# Altium PCB vizmertekpcb.PcbDoc
Units mm, origin at the board's own origin, x right, y up, seen from the top; angles counter-clockwise.
Board outline 90.17 x 81.89 mm, 2 copper layers (Top Layer, Bottom Layer); 17 components, 43 nets, 199 pads, 31 vias.
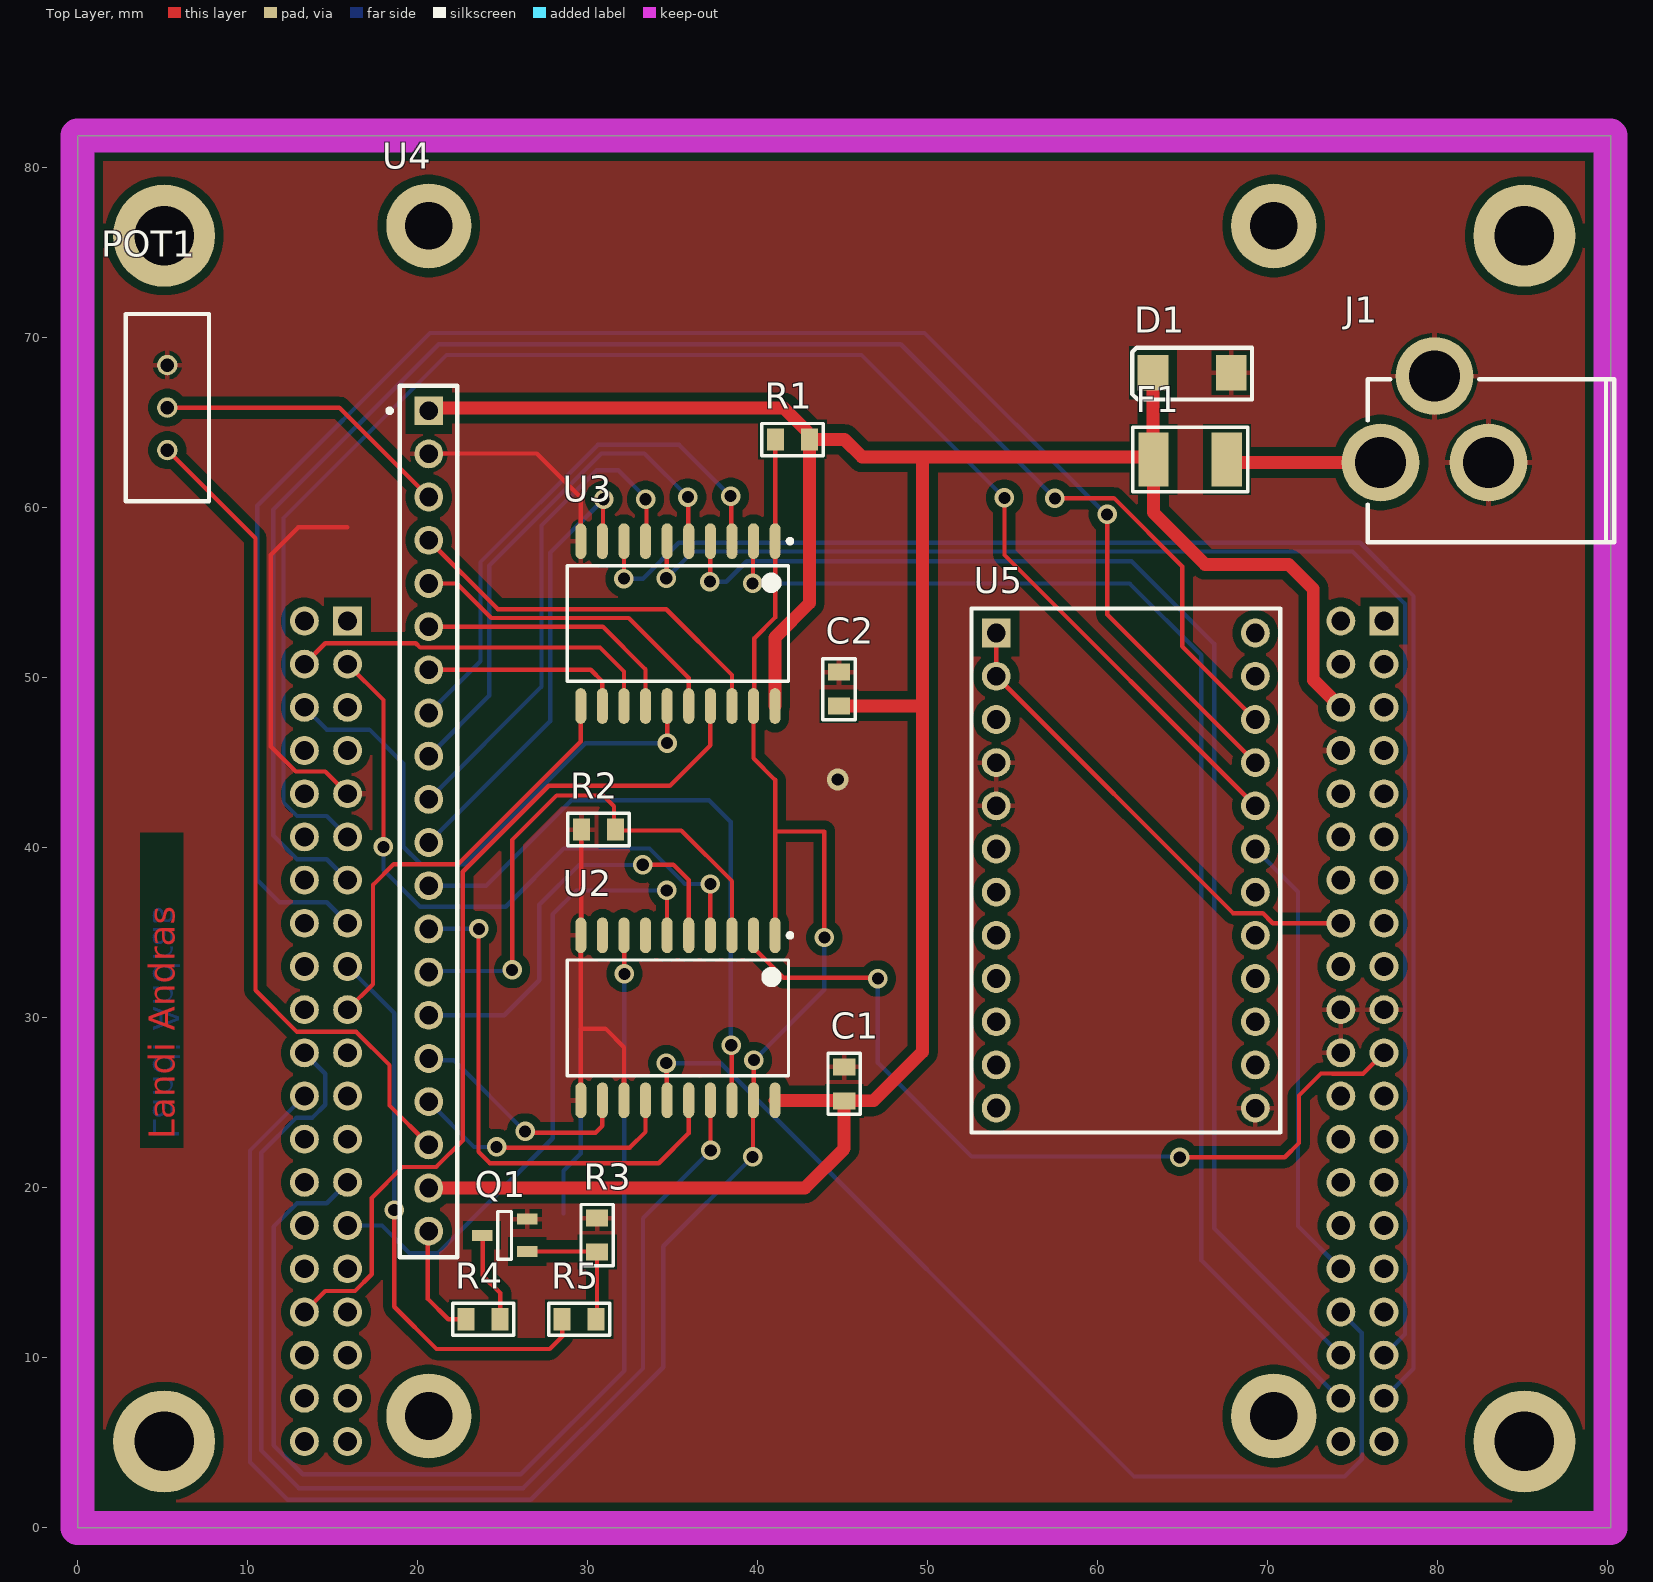
[diagram p0: Top Layer view]
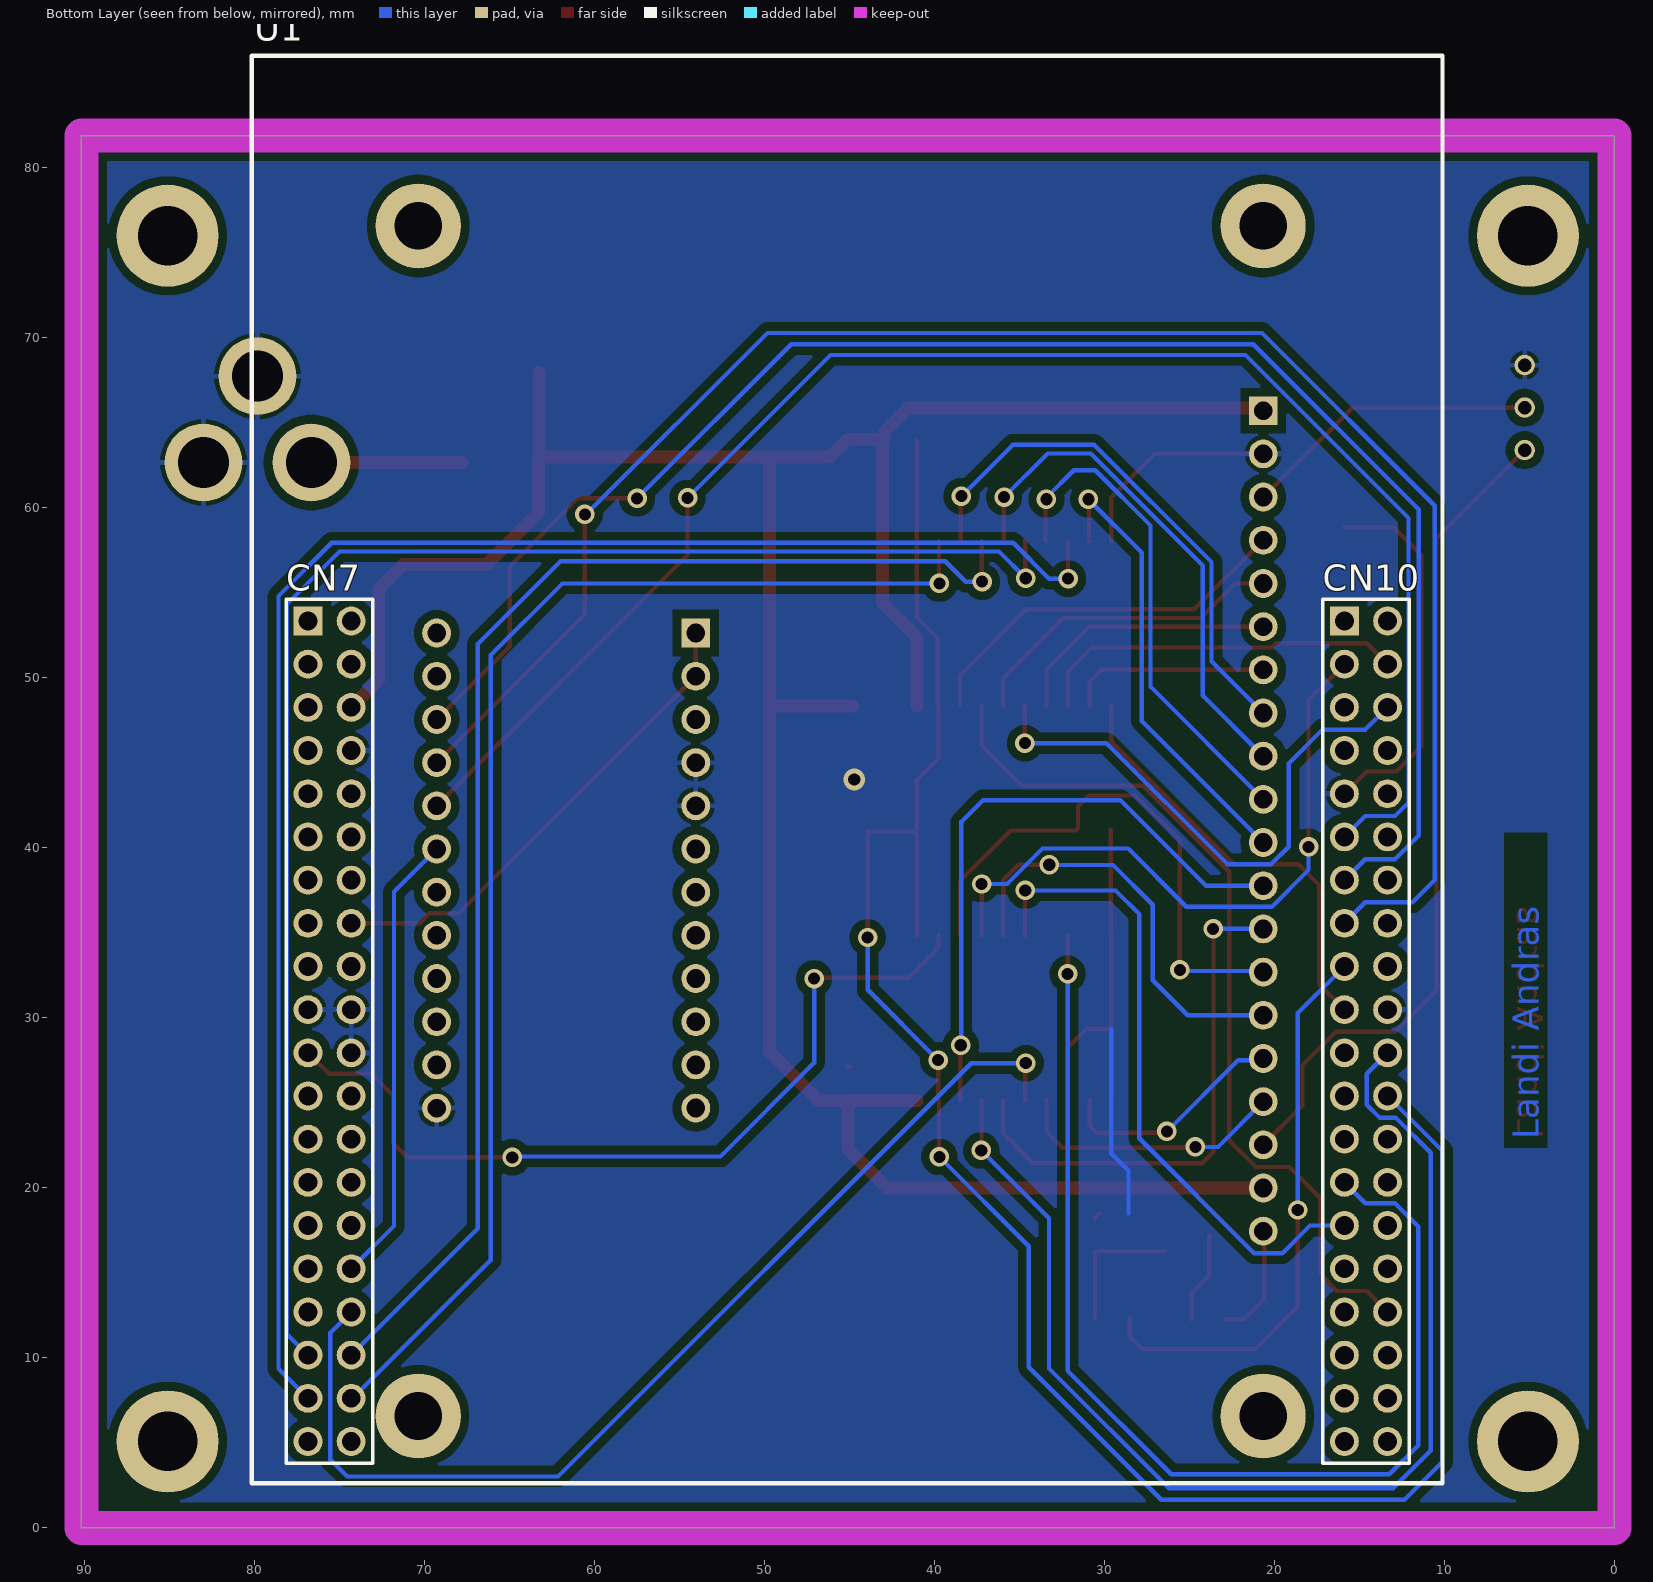
[diagram p1: Bottom Layer view, seen from below]
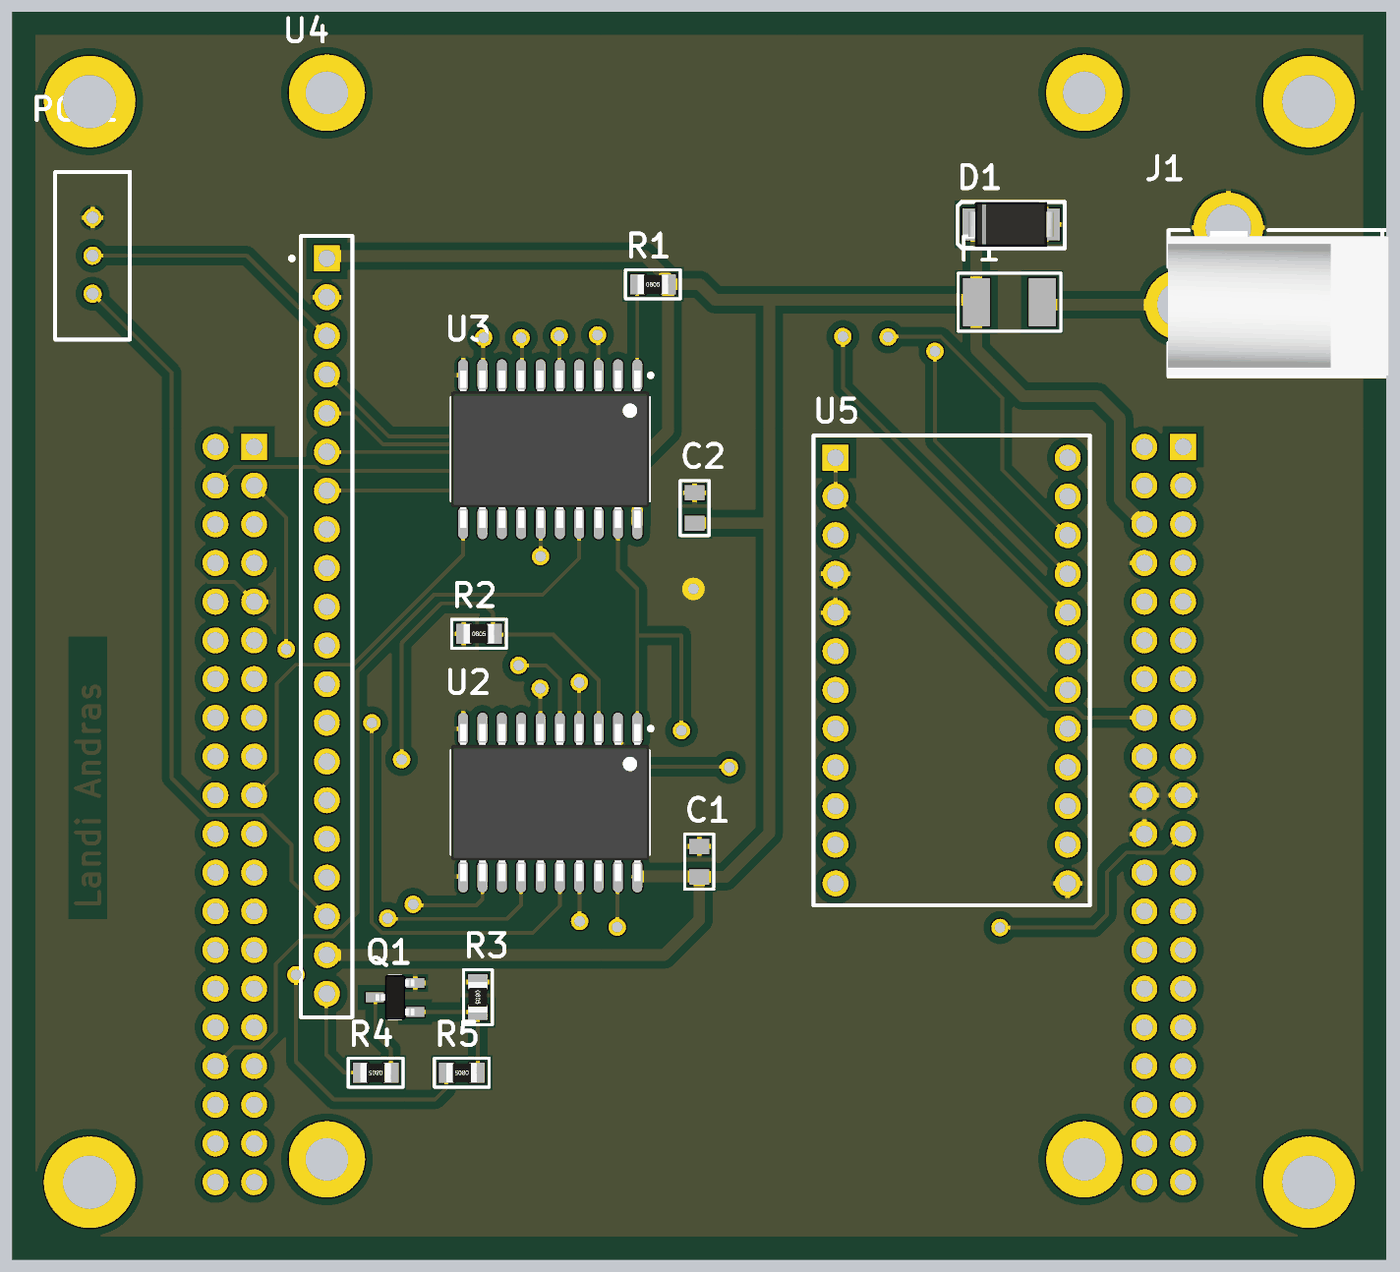
[diagram p2: 3D render of the assembled board from above, using the file's embedded part models]

## Layer stack, top to bottom
Top Solder: solder mask 0.0102, Solder Resist, Dk 3.5
Top Layer: signal copper 0.0356
Dielectric 1: dielectric 0.32, FR-4, Dk 4.8
Bottom Layer: signal copper 0.0356
Bottom Solder: solder mask 0.0102, Solder Resist, Dk 3.5

## Board outline
0,81.89 3.378,81.89 90.17,81.89 90.17,0 0,0

## Design rules (kind name [scope] priority, off if disabled: settings)
BoardOutlineClearance [All] p1: gap=0.5 ignorepadtopadclearanceinfootprint=FALSE
Clearance [All] p1: gap=0.254 ignorepadtopadclearanceinfootprint=FALSE except(0.508: Arc-Poly Track-Poly SMDPad-Poly THPad-Poly Via-Poly Fill-Poly Poly-Poly)
ComponentClearance [All] p1: gap=0.254 collisioncheckmode=3 verticalgap=0.2 showdistances=FALSE donotcheckwithout3dbody=TRUE
DiffPairsRouting [All] p1: maxlimit=0.25 minlimit=0.25 mostfreqgap=0.25 toplayer_minwidth=0.3 toplayer_maxwidth=0.38 toplayer_prefwidth=0.38 bottomlayer_minwidth=0.3 bottomlayer_maxwidth=0.38 bottomlayer_prefwidth=0.38 maxuncoupledlength=12.7
HoleSize [All] p1: absolutevalues=TRUE maxlimit=3.5 minlimit=0.4 maxpercent=80.000 minpercent=20.000
HoleToHoleClearance [All] p1: gap=0.25 allowstackedmicrovias=TRUE
MinimumAnnularRing [All] p1: minimumring=0.2
MinimumSolderMaskSliver [All] p1: minsoldermaskwidth=0.05
PlaneClearance [All] p1: clearance=0.5
PlaneConnect [All] p1: pad.planeconnectstyle=Relief pad.reliefexpansion=0.5 pad.reliefentries=4 pad.reliefconductorwidth=0.3 pad.reliefairgap=0.25 via.planeconnectstyle=Direct via.reliefexpansion=0.508 via.reliefentries=4 via.reliefconductorwidth=0.254 via.reliefairgap=0.254
PolygonConnect [All] p1: thpad.connectstyle=Relief thpad.reliefconductorwidth=0.3 thpad.reliefentries=4 thpad.polygonreliefangle="90 Angle" thpad.airgapwidth=0.25 smdpad.connectstyle=Relief smdpad.reliefconductorwidth=0.3 smdpad.reliefentries=4 smdpad.polygonreliefangle="90 Angle" smdpad.airgapwidth=0.25 via.connectstyle=Direct via.reliefconductorwidth=0.254 via.reliefentries=4 via.polygonreliefangle="90 Angle" via.airgapwidth=0.254
RoutingVias [All] p1: holewidth=0.4 width=0.8 viastyle="Through Hole" minholewidth=0.711 minwidth=1.143 maxholewidth=0.711 maxwidth=1.2
SilkToSilkClearance [All] p1: silktosilkclearance=0.1
SilkToSolderMaskClearance [IsPad] p1: minsilkscreentomaskgap=0.1 clearancetoexposedcopper=TRUE
SolderMaskExpansion [All] p1: expansion=0.1 istentingtop=FALSE
Width [All] p1: maxlimit=2.54 minlimit=0.254 preferedwidth=0.254
21 further rules are at their usual default settings.

## Classes and differential pairs
net class DB[0..7]: DB0 DB1 DB2 DB3 DB4 DB5 DB6 DB7
component class kijelzo: C1 C2 POT1 Q1 R1 R2 R3 R4 R5 U2 U3 U4
component class gyorsulasmero: U5
component class Nucleo: D1 F1 J1 U1

## Components (designator, comment, footprint, x,y, rotation, side; value= is the part's Value field where it differs from the comment)
C1 "100nF" FP_0805_CAP_085 45.085,26.121 r270 top
C2 "100nF" FP_0805_CAP_085 44.78,49.327 r270 top
D1 "6.7V" FP_SMA 65.546,67.945 r180 top
F1 "Fuse" FP_MULTIFUSE 67.589,62.84 r180 top
J1 "2.xmm" FP_DC_TAP_ANYA 76.632,62.662 r270 top
POT1 "10K" potentiometer 5.272,65.891 r0 top
Q1 "NMOS" FP_SOT23-3 25.114,17.206 r0 top
R1 "100k" FP_0805_RES 42.046,64.008 r0 top
R2 "1K" FP_0805_RES 30.632,41.072 r0 top
R3 "10k" FP_0805_RES 30.556,17.221 r270 top
R4 "100" FP_0805_RES 23.851,12.268 r180 top
R5 "100" FP_0805_RES 29.499,12.268 r180 top
U1 "NUCLEO-F446RE" FP_NUCLEO-64_2x20 76.835,53.34 r180 bottom
U2 "74HCT244" SO-20 35.306,29.997 r270 top
U3 "74HCT244" SO-20 35.306,53.188 r270 top (schematic designator x)
U4 "RG12864B-TIW-V" FP_LCD 20.65,65.709 r270 top (schematic designator U3)
U5 "MKI160V1" FP_DIL24 54.026,52.629 r180 top

## Footprints (in the part's own frame and the unit in brackets; to place one, negate y for a bottom-side part, rotate by r counter-clockwise, add the part's x,y. Pads: shape width x height; smd on the part's side, far side on the other; paste and mask are expansions set on the pad)
FP_0805_CAP_085 [mm] "0805 kapacitás YAGEO 0.85mm magas"
  rect 1x1.3 smd: 1(-1,0) 2(1,0)
  silkscreen extent -1.8,-0.95 1.8,0.95, body extent -1,-0.64 1.03,0.64, height 0.85
FP_0805_RES [mm] "0805 ellenállás"
  rect 1x1.3 smd: 1(-1,0) 2(1,0)
  silkscreen extent -1.8,-0.95 1.8,0.95, body extent -1,-0.62 1,0.63, height 0.62
FP_DC_TAP_ANYA [mil] "DC HEBA25 TÁPFESZÜLTSÉG ALJZAT ZÁRT, NYÁKBA 90°"
  round 180 hole 118: 1(0,0) 2(0,250) 3(-200,125)
  silkscreen extent -193,-30 185,541, body extent -190,-31 183,539, height 440
FP_DIL24 [mm] "DIL24"
  rect 1.7x1.7 hole 1.1: 1(0,0)
  round 1.7 hole 1.1: 2(0,2.54) 3(0,5.08) 4(0,7.62) 5(0,10.16) 6(0,12.7) 7(0,15.24) 8(0,17.78) 9(0,20.32) 10(0,22.86) 11(0,25.4) 12(0,27.94) 13(-15.24,27.94) 14(-15.24,25.4) 15(-15.24,22.86) 16(-15.24,20.32) 17(-15.24,17.78) 18(-15.24,15.24) 19(-15.24,12.7) 20(-15.24,10.16) 21(-15.24,7.62) 22(-15.24,5.08) 23(-15.24,2.54) 24(-15.24,0)
  silkscreen extent -16.7,-1.45 1.45,29.38, body extent -16.52,-1.28 1.28,29.21, height 4.86
FP_LCD [mm]
  rect 1.7x1.7 hole 1.1: 1(0,0)
  round 1.7 hole 1.1: 2(2.54,0) 3(5.08,0) 4(7.62,0) 5(10.16,0) 6(12.7,0) 7(15.24,0) 8(17.78,0) 9(20.32,0) 10(22.86,0) 11(25.4,0) 12(27.94,0) 13(30.48,0) 14(33.02,0) 15(35.56,0) 16(38.1,0) 17(40.64,0) 18(43.18,0) 19(45.72,0) 20(48.26,0)
  round 5 hole 2.8: ""(-10.87,49.7) ""(-10.87,0) ""(59.13,49.7) ""(59.13,0)
  silkscreen extent -1.47,-2.4 49.8,1.67, body extent -13.37,-3 61.63,52.2, height 17.6
FP_MULTIFUSE [mm] "POLYFUSE SMD 1812"
  rect 1.78x3.15 smd: 1(0,0) 2(4.318,0)
  silkscreen extent -1.22,-1.9 5.53,1.9, body extent -0.12,-1.71 4.57,1.71, height 1
FP_NUCLEO-64_2x20 [mm]
  round 1.7 hole 1.1: 0(0,-48.26) 0(2.54,-48.26) 0(60.96,-48.26) 0(63.5,-48.26) 2(2.54,0) 3(0,-2.54) 4(2.54,-2.54) 5(0,-5.08) 6(2.54,-5.08) 7(0,-7.62) 8(2.54,-7.62) 9(0,-10.16) 10(2.54,-10.16) 11(0,-12.7) 12(2.54,-12.7) 13(0,-15.24) 14(2.54,-15.24) 15(0,-17.78) 16(2.54,-17.78) 17(0,-20.32) 18(2.54,-20.32) 19(0,-22.86) 20(2.54,-22.86) 21(0,-25.4) 22(2.54,-25.4) 23(0,-27.94) 24(2.54,-27.94) 25(0,-30.48) 26(2.54,-30.48) 27(0,-33.02) 28(2.54,-33.02) 29(0,-35.56) 30(2.54,-35.56) 31(0,-38.1) 32(2.54,-38.1) 33(0,-40.64) 34(2.54,-40.64) 35(0,-43.18) 36(2.54,-43.18) 37(0,-45.72) 38(2.54,-45.72) 40(63.5,0) 41(60.96,-2.54) 42(63.5,-2.54) 43(60.96,-5.08) 44(63.5,-5.08) 45(60.96,-7.62) 46(63.5,-7.62) 47(60.96,-10.16) 48(63.5,-10.16) 49(60.96,-12.7) 50(63.5,-12.7) 51(60.96,-15.24) 52(63.5,-15.24) 53(60.96,-17.78) 54(63.5,-17.78) 55(60.96,-20.32) 56(63.5,-20.32) 57(60.96,-22.86) 58(63.5,-22.86) 59(60.96,-25.4) 60(63.5,-25.4) 61(60.96,-27.94) 62(63.5,-27.94) 63(60.96,-30.48) 64(63.5,-30.48) 65(60.96,-33.02) 66(63.5,-33.02) 67(60.96,-35.56) 68(63.5,-35.56) 69(60.96,-38.1) 70(63.5,-38.1) 71(60.96,-40.64) 72(63.5,-40.64) 73(60.96,-43.18) 74(63.5,-43.18) 75(60.96,-45.72) 76(63.5,-45.72)
  rect 1.7x1.7 hole 1.1: 1(0,0) 39(60.96,0)
  silkscreen extent -3.3,-50.72 66.72,33.25, body extent -3.3,-50.72 66.72,33.25, height 11
FP_SMA [mm] "SMA footprint"
  rect 1.8x2.1 smd: 1(-2.3,0) 2(2.3,0)
  silkscreen extent -3.52,-1.48 3.52,1.58, body extent -2.8,-1.47 2.8,1.48, height 2.7
FP_SOT23-3 [mm] "SOT23-3 tok"
  rect 1.2x0.65 smd: 1(1.327,-0.95) 2(1.327,0.95) 3(-1.327,0)
  silkscreen extent -0.4,-1.4 0.4,1.4, body extent -1.27,-1.46 1.27,1.46, height 0.97
potentiometer [mm]
  round 1.2 hole 0.8: 1(0,2.5) 2(0,0) 3(0,-2.5)
  silkscreen extent -2.45,-5.5 2.45,5.5, body extent -2.33,-5.4 2.33,5.4, height 10
SO-20 [mm] "SOIC, 20-Leads, Body 12.80x7.50mm, Pitch 1.27mm, IPC Low Density"
  oval 2.1x0.65 smd: 1(-4.85,5.715) 2(-4.85,4.445) 3(-4.85,3.175) 4(-4.85,1.905) 5(-4.85,0.635) 6(-4.85,-0.635) 7(-4.85,-1.905) 8(-4.85,-3.175) 9(-4.85,-4.445) 10(-4.85,-5.715) 11(4.85,-5.715) 12(4.85,-4.445) 13(4.85,-3.175) 14(4.85,-1.905) 15(4.85,-0.635) 16(4.85,0.635) 17(4.85,1.905) 18(4.85,3.175) 19(4.85,4.445) 20(4.85,5.715)
  silkscreen extent -4.97,-6.5 3.4,6.72, body extent -5.16,-6.5 5.16,6.5, height 2.65

## Part data
C1 C2: library part CAP, "Capacitor", Tolerance=10%, Voltage=50V, Reference=82-13-46, Supplier=Lomex
  C1: Name="100nF 0805 10% 50V X7R 0805B104K500NT"
  C2: Name="100nF 0805 10% 50V X7R 0805B104K500NT (FNG)"
D1: library part ZENER, "Zener Diode", Name="VISHAY SMAJ5.0A-E3/61", Reference=9550941, Supplier=Farnell, U_Z=6.7V
J1: library part DC_TAP_ANYA, "2.xmm DC HEBA25 TÁPFESZÜLTSÉG ALJZAT ZÁRT, NYÁKBA 90°", Name="TÁP DC ANYA 5.5/2.1/9.5mm DCS-5521-5", Reference=43-07-67, Supplier=Lomex
POT1: library part POT, "Potentiometer", Power=0.5W, Tolerance=10%, Name="10K0 3296W-1-103R (KIC) HELI 25turn CERMET", Reference=05-05-89, Supplier=Lomex
Q1: "NXP - BSP030,115 - MOSFET, N CH, 30V, 10A, SOT223", Name="TSM2302CX (TSC) N-POWERFET 20V 3.2A Rds<0.065R Qg=7.8nC SOT-23 (SI2302)", Reference=86-02-83, Supplier=Lomex
R1 R2: library part RES, "Resistor", Power=0.125W, Tolerance=5%, Supplier=Lomex
  R1: Name="100K 0805 1% CR-05FL7--100K 0.125W (VIK)", Reference=80-11-10
  R2: Name="1K00 0805 1% CR-05FL7----1K 0.125W (VIK)", Reference=80-10-86
R3 R4 R5: library part RES, "Resistor", Power=0.125W, Tolerance=1%, Supplier=Lomex
  R3: Name="10K0 0805 1% CR-05FL7---10K 0.125W (VIK)", Reference=80-10-98
  R4 R5: Name="100R 0805 1% CR-05FL7--100R 0.125W (VIK)", Reference=80-10-74
U4: library part LCD, Name="RG12864B-TIW-VRAYSTAR OPTRONICS", Reference=RG12864B-TIW-V, Supplier=TME
U5: "LSM6DS3 inertial module adapter", Name="MKI160V1 LSM6DS3 inertial module adapter", Reference=511-STEVAL-MKI160V1, Supplier=Mouser
F1: Name="1.25A 15V 1812L125/16DR POLYFUSE SMD 1812 (LFS) ˝LF125-16˝", Reference=44-04-71, Supplier=Lomex
U1: Name="Nucleo F446RE", Reference=NUCLEO, Supplier=Tanszék
U2 U3: Name="74HCT244D,653 (NXP) 8xBUFFER/LINE DRIVER 3-STATE OUTPUT SO-20 WIDE", Reference=87-00-95, Supplier=Lomex

## Free pads (board coordinates)
  round 6 hole 3.5: ""(5.08,5.08) ""(5.08,76) ""(85.09,5.08) ""(85.09,76)

## Via types
v1: diameter 1.143, hole 0.711, Top Layer to Bottom Layer, 30 vias
v2: diameter 1.27, hole 0.711, Top Layer to Bottom Layer, 1 vias

## Nets (pads, with @x,y where several pads share a name; then routed paths per layer and width w, separated by ;. In a path a pad name is that pad's centre, name@x,y a point inside that pad or via, vN(x,y) a via of type N, cw(c..) or ccw(c..) an arc to the next point about the centre after c; other vN are vias at no path point)
3V3: U1.16 U5.1 U5.2 | length 28.8
  Top Layer w0.254: U5.1 U5.2 67.957,36.158 69.698,36.158 70.295,35.56 U1.16
5V: C1.2 C2.2 D1.2 F1.2 R1.2 U1.6 U2.20 U3.20 U4.1 U4.19 | length 165.5
  Top Layer w0.762: U4.19 42.772,19.988 45.085,22.301 C1.2 ; U4.1 20.804,65.862 41.529,65.862 42.927,64.464 42.927,64.127 R1.2 45.11,64.008 46.126,62.992 49.682,62.992 ; U2.20 45.058,25.147 C1.2 ; U3.20 41.021,52.375 43.046,54.4 R1.2@43.046,63.858 ; C2.2 49.581,48.327 ; D1.2 63.259,67.932 F1.2@63.259,62.852 ; U1.6 72.674,49.881 72.674,55.226 71.232,56.667 66.319,56.667 63.271,59.715 F1.2 F1.2@63.259,62.852 ; C1.2 46.812,25.121 49.682,27.991 49.682,62.992 ; 49.682,62.992 63.119,62.992 F1.2@63.259,62.852
CS1: U2.18 U4.12 | length 36.8
  Top Layer w0.254: v1(38.443,28.387) 38.462,28.368 38.462,25.166 U2.18
  Bottom Layer w0.254: U4.12 24.02,37.768 29.051,42.799 37.135,42.799 38.405,41.529 38.405,28.425 v1(38.443,28.387)
CS2: U2.16 U4.13 | length 31.4
  Top Layer w0.254: v1(23.597,35.23) 23.571,35.204 23.571,22.123 24.243,21.45 34.176,21.45 35.941,23.216 U2.16
  Bottom Layer w0.254: U4.13@20.651,35.229 v1(23.597,35.23)
DB0: U3.18 U4.4 | length 22.9
  Top Layer w0.254: U4.4 24.714,54.025 34.621,54.025 38.481,50.165 U3.18
DB1: U3.16 U4.5 | length 19.2
  Top Layer w0.254: U4.5 22.292,55.549 24.324,53.517 32.412,53.517 35.941,49.987 U3.16
DB2: U3.14 U4.6 | length 15.9
  Top Layer w0.254: U4.6 30.888,53.009 33.401,50.495 U3.14
DB3: U3.12 U4.7 | length 11.9
  Top Layer w0.254: U4.7 30.176,50.469 30.861,49.784 U3.12
DB4: U3.3 U4.8 | length 31.6
  Top Layer w0.254: v1(38.405,60.681) 38.443,60.642 38.443,58.076 U3.3
  Bottom Layer w0.254: U4.8 23.693,50.971 23.693,56.803 30.589,63.7 35.386,63.7 v1(38.405,60.681)
DB5: U3.5 U4.9 | length 30.8
  Top Layer w0.254: v1(35.89,60.63) 35.916,60.604 35.916,58.063 U3.5
  Bottom Layer w0.254: U4.9 24.201,48.939 24.201,56.593 30.799,63.192 33.328,63.192 v1(35.89,60.63)
DB6: U3.7 U4.10 | length 29.6
  Top Layer w0.254: U3.7 33.452,58.088 33.452,60.452 v1(33.401,60.503)
  Bottom Layer w0.254: U4.10 27.28,49.478 27.28,58.953 30.531,62.205 31.801,62.205 33.401,60.604 v1(33.401,60.503) v1@33.382,60.503
DB7: U3.9 U4.11 | length 27
  Top Layer w0.254: U3.9@30.886,58.012 U3.9 30.899,58.076 30.899,60.465 v1(30.937,60.503)
  Bottom Layer w0.254: U4.11 27.788,47.446 27.788,57.353 v1(30.937,60.503)
DI: U2.12 U4.16 | length 13.7
  Top Layer w0.254: v1(26.314,23.317) 26.391,23.241 30.455,23.241 30.861,23.647 U2.12
  Bottom Layer w0.254: U4.16 20.748,27.51 22.122,27.51 v1(26.314,23.317)
E: U2.14 U4.17 | length 16.1
  Top Layer w0.254: v1(24.638,22.403) 24.676,22.365 32.474,22.365 33.401,23.292 U2.14
  Bottom Layer w0.254: U4.17 23.315,22.403 v1(24.638,22.403)
GND: C1.1 C2.1 D1.1 J1.2 J1.3 POT1.1 Q1.2 R2.1 R3.1 U1.8 U1.19 U1.20 U1.22 U1.47 U1.58 U2.10 U2.11 U2.13 U3.10 U4.2 U5.4 U5.5 U5.13 | length 68.6
  Top Layer w0.254: 15.85,58.852 12.979,58.852 11.354,57.226 11.354,45.96 12.825,44.489 14.566,44.489 U1.47 ; U4.2 20.677,63.195 27,63.195 29.591,60.604 U3.10 ; U2.11 29.591,29.362 ; R2.1 29.612,41.051 29.612,34.868 U2.10 29.591,29.693 29.591,29.362 ; R3.1@30.286,18.491 R3.1 ; U2.13@32.133,25.15 32.133,28.268 31.039,29.362 29.591,29.362 ; C1.1@44.935,27.121 C1.1
  Bottom Layer w0.254: 28.575,18.491 28.575,21.006 29.591,22.022 29.591,29.362
  other v2: 44.704,44.018
NetF1_1: F1.1 J1.1 | length 9.1
  Top Layer w0.254: F1.1 F1.1@67.767,62.662
  Top Layer w0.762: F1.1@67.767,62.662 J1.1
NetPOT1_2: POT1.2 U4.3 | length 17.6
  Top Layer w0.254: POT1.2 15.387,65.891 U4.3
NetPOT1_3: POT1.3 U4.18 | length 49.3
  Top Layer w0.254: POT1.3 10.457,58.207 10.457,31.617 12.903,29.171 16.385,29.171 18.34,27.216 18.34,24.838 U4.18
NetQ1_1: Q1.1 R3.2 R5.1 | length 8
  Top Layer w0.254: Q1.1 30.521,16.256 R3.2 30.55,16.215 R5.1@30.55,12.344
NetQ1_2: Q1.3 R4.1 | length 5.4
  Top Layer w0.254: Q1.3 23.825,17.168 23.825,14.834 24.851,13.808 R4.1
NetR1_1: R1.1 U1.62 U2.1 U2.19 U3.1 U3.19 | length 119.9
  Top Layer w0.254: v1(39.7,21.819) 39.726,21.844 39.726,25.122 U2.19 39.764,25.16 39.764,27.495 v1(39.776,27.508) ; U2.1 41.021,40.959 ; R1.1 41.021,63.983 U3.1 41.021,53.543 39.802,52.324 39.802,48.388 U3.19 39.751,45.263 41.021,43.993 41.021,40.959 ; v1(43.917,34.722) 43.917,40.959 41.021,40.959
  Bottom Layer w0.254: U1.62 10.135,22.2 10.135,3.861 12.344,1.651 26.645,1.651 34.442,9.449 34.442,16.561 v1(39.7,21.819) ; v1(39.776,27.508) 43.917,31.648 v1(43.917,34.722)
NetR4_2: R4.2 U4.20 | length 6.8
  Top Layer w0.254: U4.20 20.599,17.398 20.599,13.462 21.793,12.268 R4.2
NetR5_2: R5.2 U1.55 | length 33.4
  Top Layer w0.254: v1(18.618,18.694) 18.618,13.005 21.107,10.516 27.762,10.516 28.499,11.252 R5.2@28.499,12.319
  Bottom Layer w0.254: U1.55 18.618,30.277 v1(18.618,18.694)
NetU1_21: U1.21 U2.2 | length 50
  Top Layer w0.254: U2.2 39.751,34.122 41.514,32.36 47.015,32.36 v1(47.066,32.309) ; v1(64.821,21.793) 70.993,21.793 71.831,22.631 71.831,25.425 73.127,26.721 73.773,26.721 73.785,26.709 75.604,26.709 U1.21
  Bottom Layer w0.254: v1(47.066,32.309) 47.066,27.356 52.578,21.844 64.77,21.844 v1(64.821,21.793)
NetU1_32: U1.32 U5.19 | length 26.8
  Bottom Layer w0.254: U5.19 71.78,37.414 71.78,17.755 U1.32
NetU1_34: U1.34 U2.15 | length 62.8
  Top Layer w0.254: v1(34.62,27.33) 34.646,27.305 34.646,25.173 U2.15
  Bottom Layer w0.254: v1(34.62,27.33) 37.821,27.33 62.128,3.023 74.524,3.023 75.526,4.025 75.526,11.469 U1.34
NetU1_35: U1.35 U3.6 | length 92.3
  Top Layer w0.254: v1(34.62,55.855) 34.646,55.88 34.646,58.012 U3.6
  Bottom Layer w0.254: v1(34.62,55.855) 36.195,57.429 74.984,57.429 78.066,54.348 78.066,11.391 U1.35
NetU1_36: U1.36 U3.4 | length 79.5
  Top Layer w0.254: v1(37.186,55.651) 37.198,55.664 37.198,58.025 U3.4
  Bottom Layer w0.254: v1(37.186,55.651) 38.15,55.651 39.356,56.858 61.989,56.858 66.853,51.994 66.853,17.602 U1.36
NetU1_37: U1.37 U3.8 | length 98.7
  Top Layer w0.254: v1(32.131,55.829) U3.8
  Bottom Layer w0.254: v1(32.131,55.829) 33.248,55.829 35.356,57.937 75.438,57.937 78.574,54.801 78.574,9.359 U1.37
NetU1_38: U1.38 U3.2 | length 77.8
  Top Layer w0.254: v1(39.7,55.55) 39.726,55.575 39.726,58.012 U3.2
  Bottom Layer w0.254: v1(39.7,55.55) 61.874,55.55 66.091,51.333 66.091,15.748 74.219,7.62 U1.38
NetU1_41: U1.41 U2.4 | length 38.4
  Top Layer w0.254: U1.41 17.983,48.692 v1(17.983,40.056) ; U2.4 v1(37.211,37.871)
  Bottom Layer w0.254: v1(17.983,40.056) 17.983,38.694 20.14,36.537 25.177,36.537 28.594,39.954 33.63,39.954 35.713,37.871 v1(37.211,37.871)
NetU1_42: U1.42 U3.13 | length 22
  Top Layer w0.254: U1.42 14.566,52.031 19.887,52.031 20.14,51.778 30.722,51.778 32.131,50.368 U3.13
NetU1_44: U1.44 U3.15 | length 33.2
  Top Layer w0.254: v1(34.671,46.152) U3.15
  Bottom Layer w0.254: U1.44 14.644,46.951 17.159,46.951 19.152,44.958 19.152,40.066 20.178,39.04 22.758,39.04 29.87,46.152 v1(34.671,46.152)
NetU1_49: U1.49 U5.20 | length 95.4
  Top Layer w0.254: v1(54.508,60.579) 54.508,57.226 U5.20
  Bottom Layer w0.254: U1.49 14.644,41.871 12.903,41.871 12.104,42.67 12.104,59.401 21.689,68.986 46.101,68.986 v1(54.508,60.579)
NetU1_51: U1.51 U5.22 | length 98.3
  Top Layer w0.254: v1(57.48,60.554) 57.493,60.566 60.948,60.566 64.969,56.546 64.969,51.846 U5.22
  Bottom Layer w0.254: U1.51 14.644,39.331 12.903,39.331 11.506,40.728 11.506,59.893 21.234,69.621 48.412,69.621 v1(57.48,60.554)
NetU1_53: U1.53 U5.21 | length 105.2
  Top Layer w0.254: v1(60.554,59.614) 60.554,53.721 U5.21
  Bottom Layer w0.254: U1.53 14.644,36.791 11.875,36.791 10.566,38.1 10.566,60.122 20.726,70.282 49.809,70.282 60.477,59.614 v1(60.554,59.614)
NetU1_57: U1.57 U3.11 | length 25.8
  Top Layer w0.254: U1.57 17.372,31.977 17.372,37.819 18.593,39.04 22.319,39.04 22.396,39.116 22.454,39.116 29.591,46.253 U3.11
NetU1_60: U1.60 U2.17 | length 69.7
  Top Layer w0.254: U2.17 37.224,25.135 37.224,22.212 v1(37.236,22.2)
  Bottom Layer w0.254: U1.60 14.566,26.709 14.566,24.89 13.806,24.13 12.864,24.13 10.795,22.061 10.795,4.547 13.005,2.337 26.213,2.337 33.249,9.373 33.249,18.212 v1(37.236,22.2)
NetU1_65: U1.65 U2.8 | length 67.8
  Top Layer w0.254: U2.8 32.144,34.835 32.144,32.601 v1(32.156,32.588)
  Bottom Layer w0.254: U1.65 14.644,19.089 12.903,19.089 11.532,17.717 11.532,4.851 13.233,3.15 26.06,3.15 32.156,9.246 v1(32.156,32.588)
NetU1_67: U1.67 U2.6 | length 38.7
  Top Layer w0.254: v1(34.646,37.49) 34.658,37.478 34.658,34.86 U2.6
  Bottom Layer w0.254: U1.67 17.896,17.78 19.522,16.154 21.186,16.154 27.945,22.912 27.945,36.098 29.337,37.49 v1(34.646,37.49)
NetU1_72: U1.72 U3.17 | length 51.9
  Top Layer w0.254: U1.72 14.566,13.931 16.307,13.931 17.297,14.922 17.297,19.406 19.111,21.219 21.082,21.219 22.644,22.782 22.644,38.588 27.702,43.646 34.832,43.646 37.211,46.025 U3.17
NetU2_5: U2.5 U4.15 | length 25.2
  Top Layer w0.254: v1(33.236,39.002) 35.039,39.002 35.941,38.1 U2.5
  Bottom Layer w0.254: U4.15 25.094,30.148 27.153,32.207 27.153,36.651 29.491,38.989 33.223,38.989 v1(33.236,39.002)
RST: R2.2 U2.3 U4.14 | length 32.6
  Top Layer w0.254: v1(25.552,32.817) 25.552,40.459 28.169,43.075 30.915,43.075 31.547,42.443 31.547,41.157 R2.2 31.683,41.021 35.498,41.021 38.481,38.038 U2.3
  Bottom Layer w0.254: U4.14 20.714,32.753 25.488,32.753 v1(25.552,32.817)
pads on no net: U1.0 U1.1 U1.2 U1.3 U1.4 U1.5 U1.7 U1.9 U1.10 U1.11 U1.12 U1.13 U1.14 U1.15 U1.17 U1.18 U1.23 U1.24 U1.25 U1.26 U1.27 U1.28 U1.29 U1.30 U1.31 U1.33 U1.39 U1.40 U1.43 U1.45 U1.46 U1.48 U1.50 U1.52 U1.54 U1.56 U1.59 U1.61 U1.63 U1.64 U1.66 U1.68 U1.69 U1.70 U1.71 U1.73 U1.74 U1.75 U1.76 U2.7 U2.9 U4. U5.3 U5.6 U5.7 U5.8 U5.9 U5.10 U5.11 U5.12 U5.14 U5.15 U5.16 U5.17 U5.18 U5.23 U5.24

## Polygon pours and split planes (outlines as drawn)
GND on Bottom Layer "GND_L02_P002" (solid, remove dead copper, pour order 2): 89.891,84.607 1.143,84.607 0.813,84.938 0.508,84.633 0.508,0.61 89.433,0.61 89.662,0.381
GND on Top Layer "GND_L01_P000" (solid, remove dead copper, pour order 0): 0.533,84.506 0.635,84.607 89.459,84.607 89.459,1.067 89.687,0.838 0.533,0.838

## Keep-outs
Keep-Out Layer:
  the board outline again, w2

## Other copper
Top Layer:
  text "Landi Andras" at 5.715,22.86 h1.52 r90
Bottom Layer:
  text "Landi Andras" at 4.445,22.86 h1.52 r270

## Silkscreen, mask and mechanical layers (free items; w line width, h text height)
Mechanical 1:
  the board outline again, w0.5

## Text inside footprints (layer, text, board x,y; h text height)
U1: Bottom Overlay "CN7" at 78.105,55.118 h1.52; Bottom Overlay "CN10" at 17.145,55.118 h1.52